# Altium PCB PCB1.PcbDoc
Units mil, origin at the board's own origin, x right, y up, seen from the top; angles counter-clockwise.
Board outline 1305 x 910 mil, 2 copper layers (Top Layer, Bottom Layer); 9 components, 6 nets, 20 pads, 0 vias.
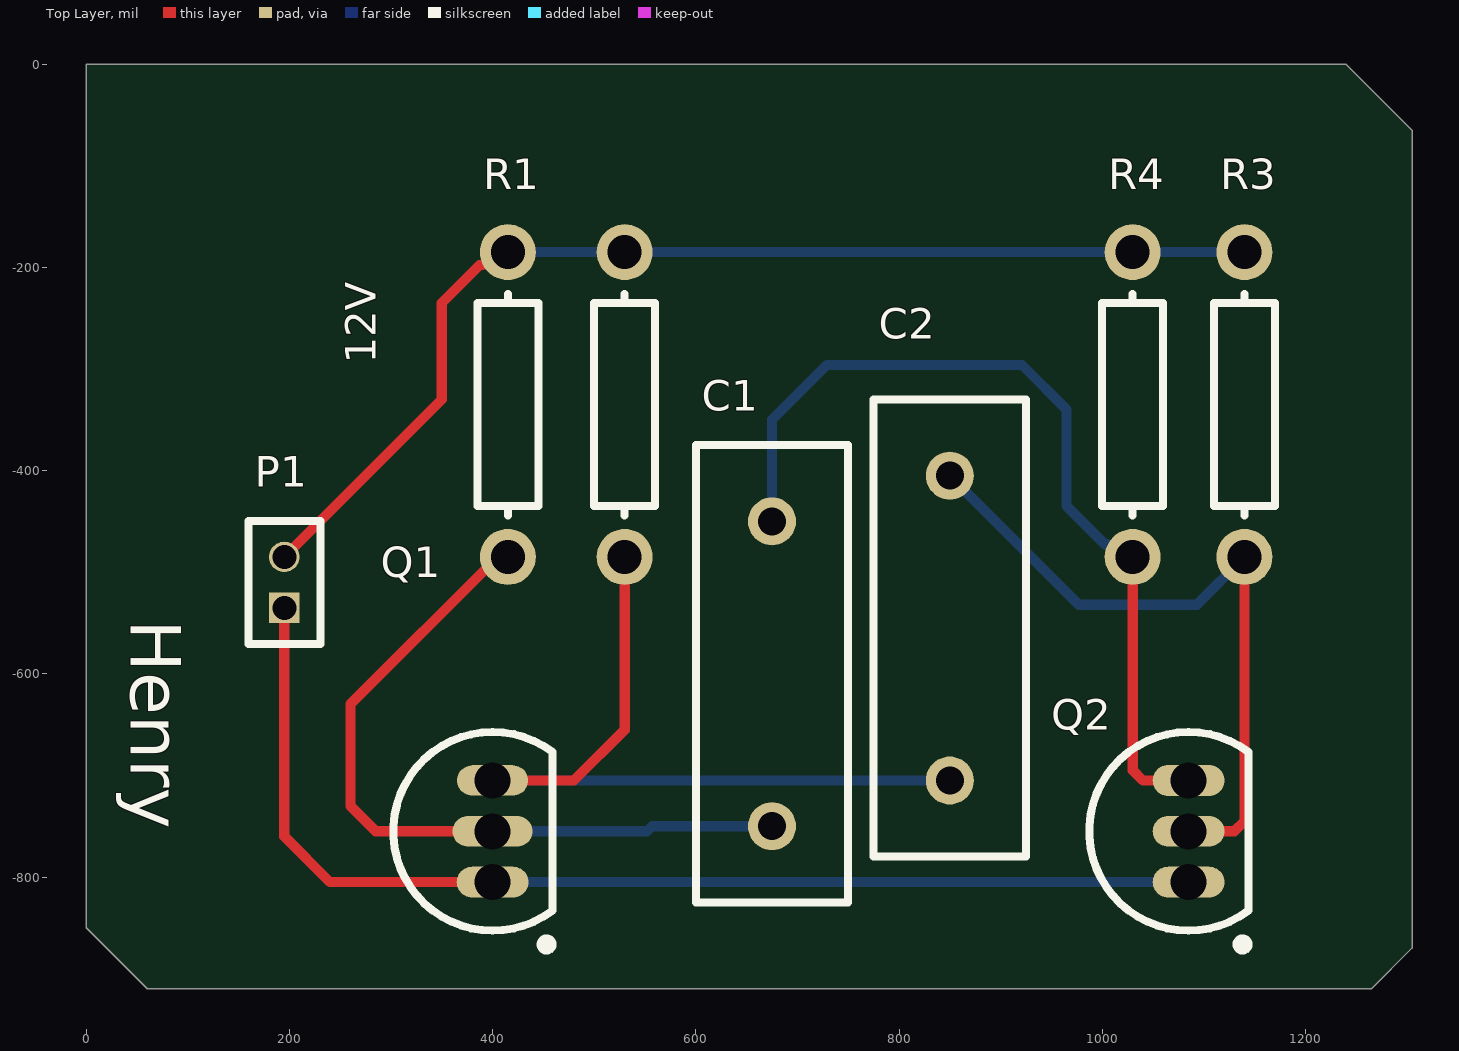
[diagram p0: Top Layer view]
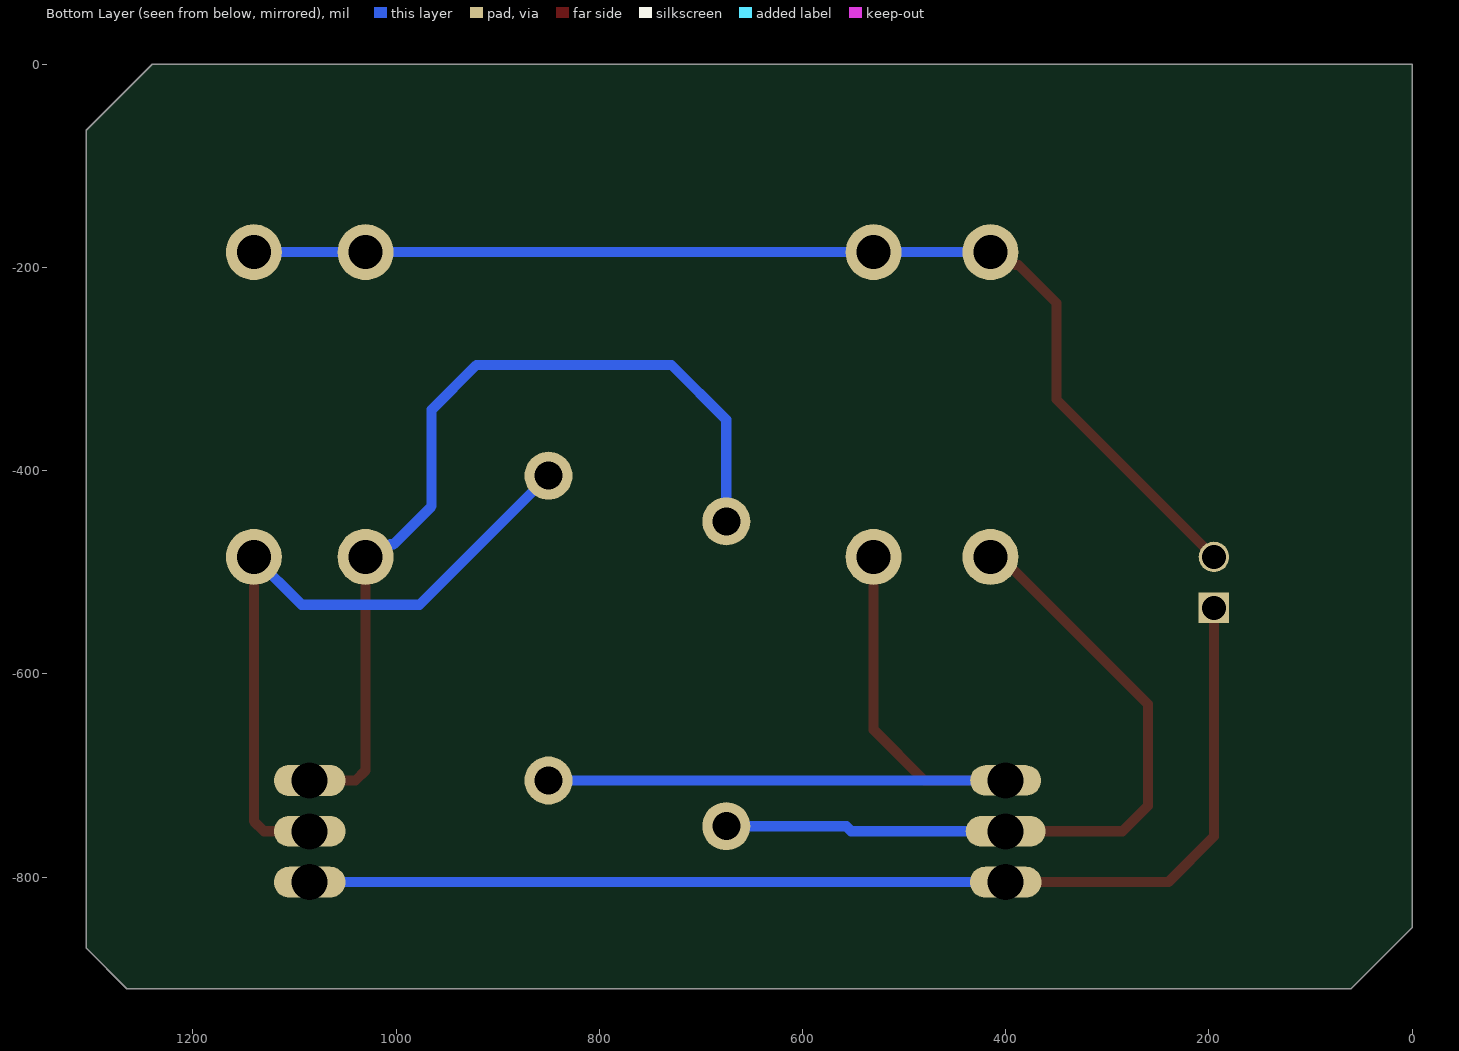
[diagram p1: Bottom Layer view, seen from below]

## Layer stack, top to bottom
Top Solder: solder mask 0.4, Solder Resist, Dk 3.5
Top Layer: signal copper 1.4
Dielectric 1: dielectric 12.6, FR-4, Dk 4.8
Bottom Layer: signal copper 1.4
Bottom Solder: solder mask 0.4, Solder Resist, Dk 3.5

## Board outline
60,-910 0,-850 0,0 1240,0 1305,-65 1305,-870 1265,-910

## Design rules (kind name [scope] priority, off if disabled: settings)
Clearance [All] p1: gap=10 ignorepadtopadclearanceinfootprint=FALSE except(0: Arc-Hole Track-Hole SMDPad-Hole THPad-Hole Via-Hole Fill-Hole Poly-Hole Region-Hole Text-Hole)
PolygonConnect [All] p1: connectstyle=Relief reliefconductorwidth=10 reliefentries=4 polygonreliefangle="90 Angle" airgapwidth=10
RoutingVias [All] p1: holewidth=28 width=50 viastyle="Through Hole" minholewidth=28 minwidth=50 maxholewidth=28 maxwidth=50
SilkToSolderMaskClearance "Minimum Solder Mask Sliver" [IsPad] p1: minsilkscreentomaskgap=5 clearancetoexposedcopper=FALSE
SolderMaskExpansion [All] p1: expansion=4 istentingtop=FALSE
Width [All] p1: maxlimit=10 minlimit=10 preferedwidth=10
29 further rules are at their usual default settings.

## Classes and differential pairs
component class Firstaltiumprojectbyhenry: C1 C2 P1 Q1 Q2 R1 R3 R4

## Components (designator, comment, footprint, x,y, rotation, side; value= is the part's Value field where it differs from the comment)
C1 "Cap" RAD-0.3 675,-600 r90 top value=20NF
C2 "Cap" RAD-0.3 850,-555 r90 top value=20NF
P1 "MHDR1X2" MHDR1X2 195,-535 r90 top
Q1 "2N3904" TO-92A#1 400,-755 r0 top
Q2 "2N3904" TO-92A#2 1085,-755 r0 top
R1 "Res1" AXIAL-0.3 415,-335 r90 top value=1K
R2 "Res1" AXIAL-0.3 530,-335 r270 top value=1K
R3 "Res1" AXIAL-0.3 1140,-335 r90 top value=1K
R4 "Res1" AXIAL-0.3 1030,-335 r90 top value=1K

## Footprints (in the part's own frame and the unit in brackets; to place one, negate y for a bottom-side part, rotate by r counter-clockwise, add the part's x,y. Pads: shape width x height; smd on the part's side, far side on the other; paste and mask are expansions set on the pad)
AXIAL-0.3 [mm] "Axial Device, Thru-Hole; 2 Leads; 0.3 in Pin Spacing"
  round 1.4 hole 0.85: 1(-3.81,0) 2(3.81,0)
  silkscreen extent -2.77,-0.76 2.77,0.76
MHDR1X2 [mil] "Connector; Header; 2 Position"
  rect 30x30 hole 23.62 mask+4: 1(0,0)
  round 30 hole 23.62: 2(50,0)
  silkscreen extent -35,-35 85,35
RAD-0.3 [mm] "Radial Cap, Thru-Hole; 2 Leads; 0.3 in Pin Spacing"
  round 1.2 hole 0.7: 1(-3.81,0) 2(3.81,0)
  silkscreen extent -5.71,-1.91 5.71,1.91
TO-92A#1 [mm] "TO, Flat Index; 3 In-Line, Axial Leads; Body Dia. 4.5mm; Leads 0.51 x 0.48 mm (max)"
  oval 1.797x0.771 hole 0.9: 1(0,-1.27)
  oval 2x0.771 hole 0.9: 2(0,0)
  oval 1.778x0.762 hole 0.9: 3(0,1.27)
  silkscreen extent -2.48,-2.95 1.5,2.48, body extent -2.48,-2.5 1.5,2.5, height 6.86
TO-92A#2 [mm] "TO, Flat Index; 3 In-Line, Axial Leads; Body Dia. 4.5mm; Leads 0.51 x 0.48 mm (max)"
  oval 1.797x0.771 hole 0.9: 1(0,-1.27) 2(0,0) 3(0,1.27)
  silkscreen extent -2.48,-2.95 1.5,2.48, body extent -2.48,-2.5 1.5,2.5, height 6.86

## Part data
C1 C2: "Capacitor", LatestRevisionDate=17-Jul-2002, LatestRevisionNote="Re-released for DXP Platform.", PackageDescription="Radial Cap, Thru-Hole; 2 Leads; 0.3 in Pin Spacing", PackageReference=RAD-0.3, Published=8-Jun-2000, Publisher="Altium Limited"
P1: "Header, 2-Pin", LatestRevisionDate=17-Jul-2002, LatestRevisionNote="Re-released for DXP Platform.", Publisher="Altium Limited"
Q1 Q2: "NPN General Purpose Amplifier", ComponentLink1Description="Manufacturer Link", ComponentLink1URL=http://www.fairchildsemi.com/, ComponentLink2Description=Datasheet, ComponentLink2URL=http://www.fairchildsemi.com/ds/2N%2F2N3904.pdf, DatasheetVersion=1997, LatestRevisionDate=15-Jan-2003, LatestRevisionNote="PCB Footprint 'BCY-W3/D4.7' replaced", PackageDescription="TO, Flat Index; 3 In-Line, Axial Leads; Body Dia. 4.5mm; Leads 0.51 x 0.48 mm (max)", PackageReference=TO-92A, PackageVersion=Sep-1998, Published=8-Jun-2000, Publisher="Altium Limited"
R1 R2 R3 R4: "Resistor", LatestRevisionDate=17-Jul-2002, LatestRevisionNote="Re-released for DXP Platform.", PackageDescription="Axial Device, Thru-Hole; 2 Leads; 0.3 in Pin Spacing", PackageReference=AXIAL-0.3, Published=8-Jun-2000, Publisher="Altium Limited"

## Nets (pads, with @x,y where several pads share a name; then routed paths per layer and width w, separated by ;. In a path a pad name is that pad's centre, name@x,y a point inside that pad or via, vN(x,y) a via of type N, cw(c..) or ccw(c..) an arc to the next point about the centre after c; other vN are vias at no path point)
+12: P1.2 R1.2 R2.1 R3.2 R4.2 | length 1124.9
  Top Layer w10: P1.2 350,-330 350,-235 387.41,-197.59 390.2,-197.59 402.79,-185 R1.2
  Bottom Layer w10: R1.2 R2.1 R4.2 R3.2
GND: P1.1 Q1.1 Q2.1 | length 1133.6
  Top Layer w10: P1.1 195,-760 240,-805 Q1.1@430,-805
  Bottom Layer w10: Q1.1@430,-805 Q2.1
NetC1_1: C1.1 Q1.2 R1.1 | length 702.5
  Top Layer w10: Q1.2@390,-755 285,-755 260,-730 260,-630 405,-485 R1.1
  Bottom Layer w10: Q1.2@430,-755 552,-755 557,-750 C1.1
NetC1_2: C1.2 Q2.3 R4.1 | length 880.4
  Top Layer w10: R4.1 1030,-695 1040,-705 Q2.3
  Bottom Layer w10: C1.2 675,-350 729,-296 921,-296 965,-340 965,-435 1002.41,-472.41 1005.2,-472.41 1017.79,-485 R4.1
NetC2_1: C2.1 Q1.3 R2.2 | length 710.7
  Top Layer w10: Q1.3@430,-705 480,-705 530,-655 R2.2
  Bottom Layer w10: Q1.3@430,-705 C2.1
NetC2_2: C2.2 Q2.2 R3.1 | length 681.2
  Top Layer w10: Q2.2 1130,-755 1140,-745 R3.1
  Bottom Layer w10: C2.2 977,-532 1093,-532 R3.1

## Silkscreen, mask and mechanical layers (free items; w line width, h text height)
Top Overlay:
  text "12V" at 284.99,-295 h30 r90
  text "Henry" at 43.66,-547 h50 r270
Mechanical 2:
  lines w10: 290,0 0,0 ; 0,0 1240,0 1305,-65 1305,-870 1265,-910 60,-910 0,-850 0,0